# EAGLE board F405Pill (EAGLE 7.5.0)
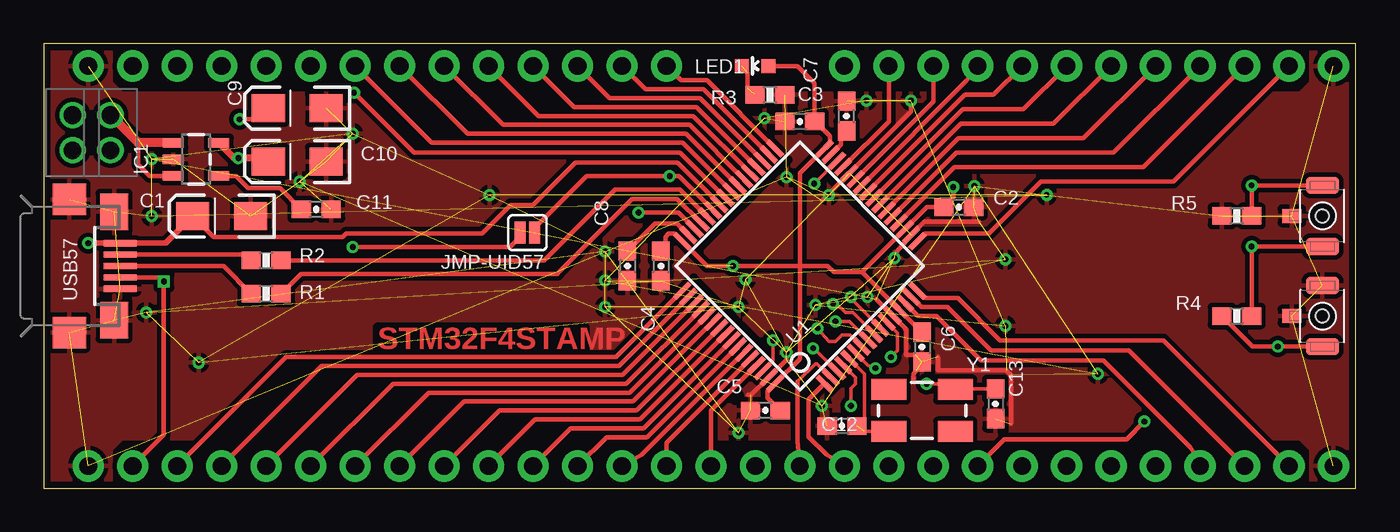
[diagram p0: board, top side]
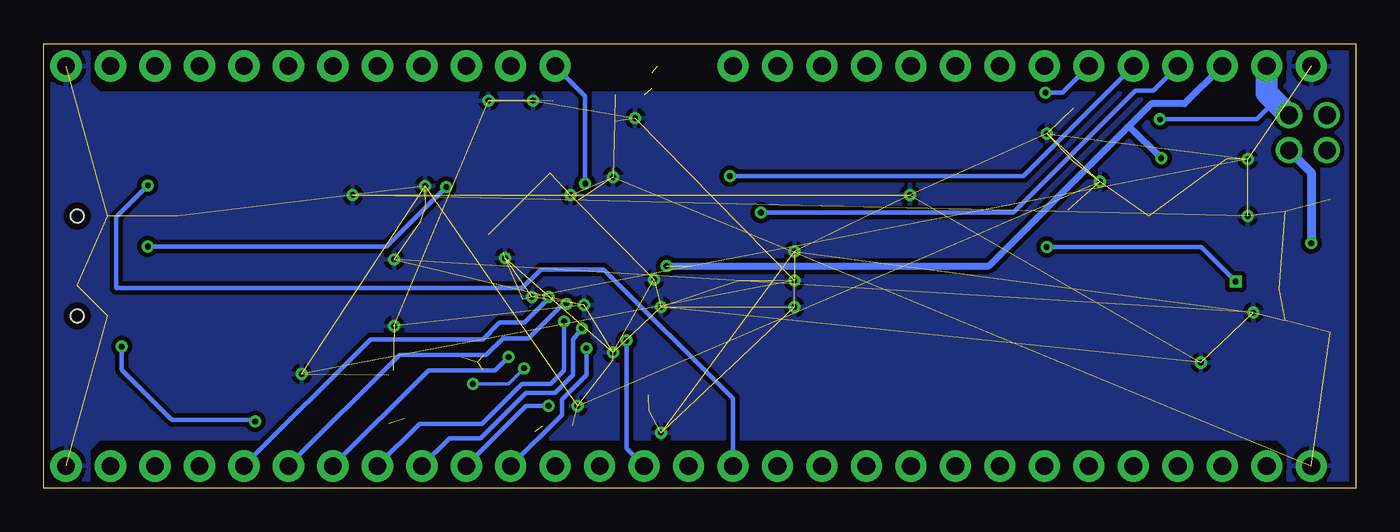
[diagram p1: board, bottom side, seen from below]

Size 74.93 x 25.4 mm. Coordinates in mm from the lower left corner, seen from the top.
Outline: 0,0 74.93,0 74.93,25.4 0,25.4 0,0
Copper layers (1*16): Top 0.0356mm / dielectric 1.5011mm / Bottom 0.0356mm
Design rules "default": minimum track width 6mil, minimum drill 13mil, track to track 6mil, track to pad 6mil, pad to pad 6mil, via to via 6mil, smd to smd 6mil, copper to edge 15mil, drill to drill 6mil, minimum pad ring 7mil, minimum via ring 7mil, stop-mask expansion 2mil, vias tented up to drill 25mil, thermal gap 10mil
tRestrict: 2 lines

## Footprints (pad centres in the part's own frame; a part is rotated, then mirrored left to right if it is on the bottom)
EIA3216-KIT = smd 1.9 x 1.6: A 1.65,0; C -1.65,0
0603-CAP = smd 1.1 x 1: 1 -0.85,0; 2 0.85,0
SOT23-5 = smd 0.55 x 1.2: 1 -0.95,-1.3; 2 0,-1.3; 3 0.95,-1.3; 4 0.95,1.3; 5 -0.95,1.3
1X02_2MM_TH = drill 1: 1 -1,0; 2 1,0
SJ_2S = smd 0.635 x 1.27: 1 -0.412,0; 2 0.412,0
1X1-HEADER-HOLE = drill 1.016 pad 1.778: 1 0,0
LED-0603 = smd 0.8 x 0.8: A 0,-0.75; C 0,0.75
0603-RES = smd 1.1 x 1: 1 -0.85,0; 2 0.85,0
SWITCH-TACT-B3U-1100P-B = smd 1 x 1.9: 1 -1.75,0; 2 1.75,0 | smd 0.8 x 1.1: BOSS 0,1.75 | hole 0.762: 0,0
LQFP64 = smd 0.3 x 1.2: 1 -3.75,-5.75; 2 -3.25,-5.75; 3 -2.75,-5.75; 4 -2.25,-5.75; 5 -1.75,-5.75; 6 -1.25,-5.75; 7 -0.75,-5.75; 8 -0.25,-5.75; 9 0.25,-5.75; 10 0.75,-5.75; 11 1.25,-5.75; 12 1.75,-5.75; 13 2.25,-5.75; 14 2.75,-5.75; 15 3.25,-5.75; 16 3.75,-5.75; 33 3.75,5.75; 34 3.25,5.75; 35 2.75,5.75; 36 2.25,5.75; 37 1.75,5.75; 38 1.25,5.75; 39 0.75,5.75; 40 0.25,5.75; 41 -0.25,5.75; 42 -0.75,5.75; 43 -1.25,5.75; 44 -1.75,5.75; 45 -2.25,5.75; 46 -2.75,5.75; 47 -3.25,5.75; 48 -3.75,5.75 | smd 1.2 x 0.3: 17 5.75,-3.75; 18 5.75,-3.25; 19 5.75,-2.75; 20 5.75,-2.25; 21 5.75,-1.75; 22 5.75,-1.25; 23 5.75,-0.75; 24 5.75,-0.25; 25 5.75,0.25; 26 5.75,0.75; 27 5.75,1.25; 28 5.75,1.75; 29 5.75,2.25; 30 5.75,2.75; 31 5.75,3.25; 32 5.75,3.75; 49 -5.75,3.75; 50 -5.75,3.25; 51 -5.75,2.75; 52 -5.75,2.25; 53 -5.75,1.75; 54 -5.75,1.25; 55 -5.75,0.75; 56 -5.75,0.25; 57 -5.75,-0.25; 58 -5.75,-0.75; 59 -5.75,-1.25; 60 -5.75,-1.75; 61 -5.75,-2.25; 62 -5.75,-2.75; 63 -5.75,-3.25; 64 -5.75,-3.75
USB-MICROB-SMD = smd 0.35 x 1.9: D+ 0,2.9; D- -0.65,2.9; GND 1.3,2.9; ID 0.65,2.9; VBUS -1.3,2.9 | smd 1.8 x 1.9: MT1 -3.8,0; MT2 3.8,0 | smd 2.1 x 1.6: MT3 -3.1,2.55; MT4 3.1,2.55
VPAC0 = drill 0.33 pad 0.686: VP 0,0
CRYSTAL-SMD-5X3 = smd 2 x 1.2: 1 -1.9,-1.2; 2 1.9,-1.2; 3 1.9,1.2; 4 -1.9,1.2

## Placement (x,y rotation side)
C1  4u7  [EIA3216-KIT]  10.16,15.56 180 top
C2  100n  [0603-CAP]  52.26,16.07 0 top
C3  100n  [0603-CAP]  43.18,20.95 180 top
C4  100n  [0603-CAP]  35.24,12.7 270 top
C5  100n  [0603-CAP]  41.21,4.45 180 top
C6  100n  [0603-CAP]  50.16,8.06 270 top
C7  2u2  [0603-CAP]  45.85,21.27 90 top
C8  2u2  [0603-CAP]  33.34,12.7 270 top
C9  4u7  [EIA3216-KIT]  14.48,21.72 180 top
C10  4u7  [EIA3216-KIT]  14.48,18.67 180 top
C11  470p  [0603-CAP]  15.56,15.94 180 top
C12  22p  [0603-CAP]  45.59,3.56 180 top
C13  22p  [0603-CAP]  54.36,4.83 270 top
IC1  VREG-3V3  [SOT23-5]  8.7,18.8 270 top
JMP-HOLDER57  [1X02_2MM_TH]  1.65,20.32 90 top
JMP-UID57  [SJ_2S]  27.62,14.61 180 top
JMP-USB57  [1X02_2MM_TH]  3.81,20.32 90 top
JP2  5V  [1X1-HEADER-HOLE]  5.08,24.13 0 top
JP3  GND  [1X1-HEADER-HOLE]  2.54,24.13 0 top
JP4  3V3  [1X1-HEADER-HOLE]  7.62,24.13 0 top
JP5  GND  [1X1-HEADER-HOLE]  2.54,1.27 0 top
JP6  GND  [1X1-HEADER-HOLE]  73.66,1.27 0 top
JP7  GND  [1X1-HEADER-HOLE]  73.66,24.13 0 top
JP8  PB8  [1X1-HEADER-HOLE]  38.1,1.27 0 top
JP9  PA10  [1X1-HEADER-HOLE]  12.7,24.13 0 top
JP10  PA8  [1X1-HEADER-HOLE]  15.24,24.13 0 top
JP11  PA13  [1X1-HEADER-HOLE]  10.16,24.13 0 top
JP12  PC9  [1X1-HEADER-HOLE]  17.78,24.13 0 top
JP13  PC15  [1X1-HEADER-HOLE]  50.8,1.27 0 top
JP14  PC14  [1X1-HEADER-HOLE]  48.26,1.27 0 top
JP15  PC13  [1X1-HEADER-HOLE]  43.18,1.27 0 top
JP16  PC12  [1X1-HEADER-HOLE]  17.78,1.27 0 top
JP17  PC11  [1X1-HEADER-HOLE]  15.24,1.27 0 top
JP18  PC10  [1X1-HEADER-HOLE]  12.7,1.27 0 top
JP19  PC8  [1X1-HEADER-HOLE]  20.32,24.13 0 top
JP20  PC7  [1X1-HEADER-HOLE]  22.86,24.13 0 top
JP21  PC6  [1X1-HEADER-HOLE]  25.4,24.13 0 top
JP22  PC5  [1X1-HEADER-HOLE]  55.88,24.13 0 top
JP23  PC4  [1X1-HEADER-HOLE]  58.42,24.13 0 top
JP24  PC3  [1X1-HEADER-HOLE]  58.42,1.27 0 top
JP25  PC2  [1X1-HEADER-HOLE]  63.5,1.27 0 top
JP26  PC1  [1X1-HEADER-HOLE]  60.96,1.27 0 top
JP27  PC0  [1X1-HEADER-HOLE]  55.88,1.27 0 top
JP28  PD2  [1X1-HEADER-HOLE]  20.32,1.27 0 top
JP29  PA0  [1X1-HEADER-HOLE]  66.04,1.27 0 top
JP30  PA1  [1X1-HEADER-HOLE]  68.58,1.27 0 top
JP31  PA2  [1X1-HEADER-HOLE]  71.12,1.27 0 top
JP32  PA3  [1X1-HEADER-HOLE]  71.12,24.13 0 top
JP33  PA4  [1X1-HEADER-HOLE]  68.58,24.13 0 top
JP34  PA5  [1X1-HEADER-HOLE]  66.04,24.13 0 top
JP35  PA6  [1X1-HEADER-HOLE]  63.5,24.13 0 top
JP36  PA7  [1X1-HEADER-HOLE]  60.96,24.13 0 top
JP37  PA14  [1X1-HEADER-HOLE]  7.62,1.27 0 top
JP38  PA15  [1X1-HEADER-HOLE]  10.16,1.27 0 top
JP39  PB0  [1X1-HEADER-HOLE]  53.34,24.13 0 top
JP40  PB1  [1X1-HEADER-HOLE]  50.8,24.13 0 top
JP41  PB3  [1X1-HEADER-HOLE]  22.86,1.27 0 top
JP42  PB4  [1X1-HEADER-HOLE]  25.4,1.27 0 top
JP43  PB5  [1X1-HEADER-HOLE]  27.94,1.27 0 top
JP44  PB6  [1X1-HEADER-HOLE]  30.48,1.27 0 top
JP45  PB7  [1X1-HEADER-HOLE]  33.02,1.27 0 top
JP46  PB9  [1X1-HEADER-HOLE]  40.64,1.27 270 top
JP47  PB10  [1X1-HEADER-HOLE]  48.26,24.13 270 top
JP48  PB11  [1X1-HEADER-HOLE]  45.72,24.13 270 top
JP49  PB12  [1X1-HEADER-HOLE]  35.56,24.13 270 top
JP50  PB13  [1X1-HEADER-HOLE]  33.02,24.13 270 top
JP51  PB14  [1X1-HEADER-HOLE]  30.48,24.13 270 top
JP52  PB15  [1X1-HEADER-HOLE]  27.94,24.13 270 top
JP53  VBAT  [1X1-HEADER-HOLE]  45.72,1.27 0 top
JP54  !RST  [1X1-HEADER-HOLE]  53.34,1.27 0 top
JP55  BOOT0  [1X1-HEADER-HOLE]  35.56,1.27 0 top
JP56  USB-ID  [1X1-HEADER-HOLE]  5.08,1.27 0 top
LED1  [LED-0603]  40.64,24.13 90 top
R1  22R  [0603-RES]  12.7,11.11 0 top
R2  22R  [0603-RES]  12.7,13.02 0 top
R3  470R  [0603-RES]  41.47,22.48 180 top
R4  10K  [0603-RES]  68.14,9.84 0 top
R5  10K  [0603-RES]  68.14,15.56 180 top
SW1  !RST  [SWITCH-TACT-B3U-1100P-B]  73.03,9.84 90 top
SW2  BOOT  [SWITCH-TACT-B3U-1100P-B]  73.03,15.56 90 top
U1  STM32F405RGT  [LQFP64]  43.18,12.7 45 top
USB57  USB-MICROB-SMD  [USB-MICROB-SMD]  1.46,12.7 270 top
VP_0  VPDEV0  [VPAC0]  42.42,17.78 0 top
VP_1  VPDEV0  [VPAC0]  44.83,16.76 0 top
VP_2  VPDEV0  [VPAC0]  40.07,11.94 0 top
VP_3  VPDEV0  [VPAC0]  42.42,7.75 0 top
VP_4  VPDEV0  [VPAC0]  48.58,13.14 0 top
VP_5  VPDEV0  [VPAC0]  47.05,10.92 0 top
VP_6  VPDEV0  [VPAC0]  6.16,18.8 0 top
VP_7  VPDEV0  [VPAC0]  17.65,20.26 0 top
VP_8  VPDEV0  [VPAC0]  14.61,17.53 0 top
VP_9  VPDEV0  [VPAC0]  44.45,4.7 0 top
VP_10  VPDEV0  [VPAC0]  53.15,17.27 0 top
VP_11  VPDEV0  [VPAC0]  60.2,6.54 0 top
VP_12  VPDEV0  [VPAC0]  32.07,11.87 0 top
VP_13  VPDEV0  [VPAC0]  41.15,21.15 0 top
VP_14  VPDEV0  [VPAC0]  46.99,22.16 0 top
VP_15  VPDEV0  [VPAC0]  49.53,22.16 0 top
VP_16  VPDEV0  [VPAC0]  54.93,9.27 0 top
VP_17  VPDEV0  [VPAC0]  44.07,10.48 0 top
VP_18  VPDEV0  [VPAC0]  54.93,13.08 0 top
VP_19  VPDEV0  [VPAC0]  5.84,10.03 0 top
VP_20  VPDEV0  [VPAC0]  32.07,13.53 0 top
VP_21  VPDEV0  [VPAC0]  39.69,3.17 0 top
VP_22  VPDEV0  [VPAC0]  32.07,10.35 0 top
VP_23  VPDEV0  [VPAC0]  39.69,10.35 0 top
VP_24  VPDEV0  [VPAC0]  8.84,7.18 0 top
VP_25  VPDEV0  [VPAC0]  25.46,16.76 0 top
VP_26  VPDEV0  [VPAC0]  57.28,16.76 0 top
VP_27  VPDEV0  [VPAC0]  6.16,15.56 0 top
Y1  8MHz  [CRYSTAL-SMD-5X3]  50.16,4.45 180 top

## Library data of the parts
C1-C13 IC1 JMP-HOLDER57 JMP-UID57 JMP-USB57 JP2-JP56 LED1 R1-R5 SW1 SW2 U1 USB57 Y1 = stm32f4stamp
VP_0 VP_1-VP_27 = vpad

## Nets
3.3V: C2.1 C3.1 C4.1 C5.1 C6.1 C10.A IC1.5 JP4.1 LED1.A R4.2 SW2.1 U1.13 U1.19 U1.32 U1.48 U1.64
5V: C9.A IC1.1 IC1.3 JMP-USB57.2 JP2.1
GND: C1.C C2.2 C3.2 C4.2 C5.2 C6.2 C7.2 C8.2 C9.C C10.C C11.1 C12.2 C13.2 IC1.2 JP3.1 JP5.1 JP6.1 JP7.1 R3.1 R5.2 SW1.2 SW1.BOSS SW2.BOSS U1.12 U1.18 U1.28 U1.63 USB57.GND USB57.MT1 USB57.MT2 USB57.MT3 USB57.MT4 VP_0.VP VP_1.VP VP_2.VP VP_3.VP VP_4.VP VP_5.VP VP_6.VP VP_7.VP VP_8.VP VP_9.VP VP_10.VP VP_11.VP VP_12.VP VP_13.VP VP_14.VP VP_15.VP VP_16.VP VP_17.VP VP_18.VP VP_19.VP VP_20.VP VP_21.VP VP_22.VP VP_23.VP VP_24.VP VP_25.VP VP_26.VP VP_27.VP
N$1: R1.2 U1.45
N$2: R2.2 U1.44
N$3: C1.A JMP-USB57.1 U1.42 USB57.VBUS
N$4: JP12.1 U1.40
N$5: R1.1 USB57.D+
N$6: R2.1 USB57.D-
N$7: JP8.1 U1.61
N$8: C11.2 IC1.4
N$10: JP10.1 U1.41
N$11: JP11.1 U1.46
N$12: C13.1 U1.6 Y1.1
N$13: C7.1 U1.31
N$14: C8.1 U1.47
N$15: C12.1 U1.5 Y1.3
N$16: JP55.1 R5.1 SW2.2 U1.60
N$17: JP54.1 R4.1 SW1.1 U1.7
N$18: LED1.C R3.2
N$20: JMP-UID57.2 JP56.1 USB57.ID
N$22: JMP-UID57.1 JP9.1 U1.43
N$23: JP13.1 U1.4
N$24: JP14.1 U1.3
N$25: JP15.1 U1.2
N$26: JP16.1 U1.53
N$27: JP17.1 U1.52
N$28: JP18.1 U1.51
N$29: JP19.1 U1.39
N$30: JP20.1 U1.38
N$31: JP21.1 U1.37
N$32: JP22.1 U1.25
N$33: JP23.1 U1.24
N$34: JP24.1 U1.11
N$35: JP25.1 U1.10
N$36: JP26.1 U1.9
N$37: JP27.1 U1.8
N$38: JP28.1 U1.54
N$39: JP29.1 U1.14
N$40: JP30.1 U1.15
N$41: JP31.1 U1.16
N$42: JP32.1 U1.17
N$43: JP33.1 U1.20
N$44: JP34.1 U1.21
N$45: JP35.1 U1.22
N$46: JP36.1 U1.23
N$47: JP37.1 U1.49
N$48: JP38.1 U1.50
N$49: JP39.1 U1.26
N$50: JP40.1 U1.27
N$51: JP41.1 U1.55
N$52: JP42.1 U1.56
N$53: JP43.1 U1.57
N$54: JP44.1 U1.58
N$55: JP45.1 U1.59
N$56: JP46.1 U1.62
N$57: JP47.1 U1.29
N$58: JP48.1 U1.30
N$59: JP49.1 U1.33
N$60: JP50.1 U1.34
N$61: JP51.1 U1.35
N$62: JP52.1 U1.36
N$63: JP53.1 U1.1

## Tracks (layer width: path | path; a pad name or v marks a point on that pad's centre or on a via)
3.3V  (via drill 0.33)  (1 unrouted)
  Top 0.254: C6.1 50.16,8.9 U1.13 46.72,12.35 | 43.18,12.7 37.88,12.7 U1.48 36.03,14.54 35.68,14.54 35.5,14.36 35.5,14.03 35.24,13.78 C4.1 | 43.18,12.7 43.18,18 U1.32 44.9,19.72 44.9,20.13 44.07,20.95 C3.1 44.03,23.15 43.05,24.13 LED1.A | 46.72,12.35 U1.19 50.44,16.07 C2.1 51.94,16.6 v51.94,17.21 | 43.18,12.7 43.18,7.4 U1.64 41.34,5.55 41.34,5.17 C5.1 | 46.72,12.35 45.12,12.35 44.77,12.7 43.18,12.7 | SW2.1 v68.99,13.81 R4.2
  Top 0.406: IC1.5 10.89,18.86 v11.11,18.86 12.64,18.86 C10.A
  Bottom 0.254: v51.94,17.21 55.34,13.81 v68.99,13.81
  Bottom 0.406: v39.37,12.7 20.95,12.7 13.02,20.64 | 13.02,20.64 11.68,21.97 9.78,21.97 JP4.1 | v11.11,18.86 12.89,20.64 13.02,20.64
5V  (via drill 0.33)
  Top 0.254: v11.18,21.08 13.02,21.08 C9.A | IC1.3 6.04,17.85 5.4,18.49 5.4,19.75
  Top 0.508: IC1.1 5.4,19.75 5.38,19.75 JMP-USB57.2
  Bottom 0.254: v11.18,21.08 5.65,21.08 4.61,22.12
  Bottom 1.27: JMP-USB57.2 4.61,22.12 5.08,22.59 JP2.1
GND  (116 unrouted)
  Top 0.203: 44.45,16.45 VP_1.VP
  Top 0.254: 42.42,7.34 U1.63 40.4,5.32 40.22,5.32 | 47.56,10.79 U1.12 49.24,9.11 49.24,7.65 49.28,7.62 49.78,7.62 | 48.66,13.46 U1.18 50.31,15.23 53.42,15.23 | 55.24,3.68 55.24,6.48 54.99,6.73 51.05,6.73 51.05,7.49 | 44.45,16.45 49.53,21.52 VP_15.VP | 49.85,6.73 49.66,6.54 49.66,6.16
  pour Bottom (isolate 0.254): 0,25.4 3.81,25.4 3.81,23.18 4.45,22.54 71.75,22.54 72.39,23.18 72.39,25.4 74.93,25.4 74.93,0 72.39,0 72.39,2.22 71.75,2.86 4.45,2.86 3.81,2.22 3.81,0 0,0
  pour Top (isolate 0.254): 0,25.4 3.81,25.4 3.81,23.18 4.45,22.54 71.75,22.54 72.39,23.18 72.39,25.4 74.93,25.4 74.93,0 72.39,0 72.39,2.22 71.75,2.86 4.45,2.86 3.81,2.22 3.81,0 0,0
N$1
  Top 0.254: U1.45 36.17,16.53 33.61,16.53 29.46,12.38 29.34,12.26 14.69,12.26 R1.2
N$2
  Top 0.254: U1.44 36.34,17.07 32.63,17.07 28.89,13.34 28.57,13.02 R2.2
N$3  (via drill 0.33)
  Top 0.254: U1.42 36.2,18.62 30.36,18.62 27.94,16.19 26.67,16.19 25.02,14.54 17.27,14.54 17.08,14.35 9.72,14.35 C1.A
  Top 0.305: C1.A 6.95,14 USB57.VBUS v2.54,14
  Bottom 0.508: JMP-USB57.1 2.54,18.05 v2.54,14
N$4
  Top 0.254: U1.40 36.48,19.75 22.16,19.75 JP12.1
N$5
  Top 0.254: USB57.D+ 10.26,12.7 R1.1
N$6
  Top 0.254: USB57.D- 11.84,13.35 R2.1
N$7
  Top 0.254: U1.61 38.1,4.44 JP8.1
N$8
  Top 0.254: IC1.4 10.98,17.85 11.68,17.14 13.5,17.14 C11.2
N$10  (via drill 0.33)
  Top 0.254: U1.41 36.35,19.18 21.14,19.18 v17.72,22.61
  Bottom 0.254: v17.72,22.61 16.76,22.61 JP10.1
N$11  (via drill 0.33)
  Top 0.254: U1.46 36.24,15.75 v33.97,15.75
  Bottom 0.254: JP11.1 11.56,22.73 12.57,22.73 19.56,15.75 v33.97,15.75
N$12  (via drill 0.33)
  Top 0.203: U1.6 47.08,7.03 v47.5,6.86 | v50.42,5.97 52.06,5.97 Y1.1 52.06,5.68 C13.1
  Bottom 0.203: v47.5,6.86 48.39,5.97 v50.42,5.97
N$13
  Top 0.254: U1.31 45.53,19.65 45.53,20 45.85,20.32 C7.1
N$14
  Top 0.254: U1.47 36.17,15.11 34.9,15.11 C8.1
N$15  (1 unrouted)
  Top 0.203: U1.5 46.86,6.54 46.86,3.25 Y1.3 47.72,3.25
N$16  (via drill 0.33)
  Top 0.254: U1.60 35.56,2.6 JP55.1 | SW2.2 v68.99,17.31 R5.1
  Bottom 0.254: JP55.1 35.56,5.13 42.95,12.51 46.54,12.51 47.62,11.43 70.8,11.43 70.8,15.49 v68.99,17.31
N$17  (via drill 0.33)
  Top 0.203: U1.7 46.06,8.76 45.59,8.76 45.21,8.38 44.83,8.38 v44.2,9.14
  Top 0.254: JP54.1 54.86,2.79 61.85,2.79 v62.87,3.81 | R4.1 69.03,8.09 v70.48,8.09 SW1.1
  Bottom 0.254: JP54.1 51.75,2.86 49.97,2.86 47.37,5.46 45.72,5.46 44.7,6.48 44.7,8.51 v44.2,9.14 | v62.87,3.81 62.99,3.91 67.63,3.91 70.48,6.77 v70.48,8.09
N$18  (2 unrouted)
  Top 0.254: 40.2,23.75 40.2,22.86
N$20  (via drill 0.33)
  Top 0.254: USB57.ID 6.62,12.05 v6.86,11.81 6.86,3.05 JP56.1 | v17.65,13.78 26.64,13.78 27.21,14.35 JMP-UID57.2
  Bottom 0.254: v17.65,13.78 8.83,13.78 v6.86,11.81
N$22  (via drill 0.33)
  Top 0.254: U1.43 36.27,17.84 v35.75,17.84 31,17.84 28.03,14.87 JMP-UID57.1
  Bottom 0.254: v35.75,17.84 18.99,17.84 JP9.1
N$23  (via drill 0.33)
  Top 0.203: U1.4 46.35,6.34 46.35,5.97 46.1,5.71 v46.1,4.7
  Bottom 0.254: JP13.1 47.37,4.7 v46.1,4.7
N$24  (via drill 0.33)
  Top 0.203: U1.3 43.99,8
  Top 0.254: 43.99,8 v43.94,8
  Bottom 0.254: JP14.1 45.34,4.19 45.34,5.08 43.94,6.48 v43.94,8
N$25
  Top 0.203: U1.2 44.17,7.11 44.07,7.11 43.05,6.1
  Top 0.254: 43.05,6.1 43.05,2.67 JP15.1
N$26
  Top 0.254: U1.53 33.47,5.46 21.97,5.46 JP16.1
N$27
  Top 0.254: U1.52 33.27,5.97 19.94,5.97 JP17.1
N$28
  Top 0.254: U1.51 33.07,6.48 17.91,6.48 JP18.1
N$29
  Top 0.254: U1.39 36.68,20.26 24.19,20.26 JP19.1
N$30
  Top 0.254: U1.38 36.88,20.77 26.23,20.77 JP20.1
N$31
  Top 0.254: U1.37 37.08,21.27 28.26,21.27 JP21.1
N$32
  Top 0.254: U1.25 52.6,22.48 54.23,22.48 JP22.1
N$33
  Top 0.254: U1.24 52.49,21.65 55.94,21.65 JP23.1
N$34  (via drill 0.33)
  Top 0.203: U1.11 48.77,8.88 48.77,7.87 v48.39,7.49
  Bottom 0.254: JP24.1 52.96,6.73 49.15,6.73 v48.39,7.49
N$35  (via drill 0.33)
  Top 0.203: U1.10 46.1,10.84
  Top 0.254: 46.1,10.84 v46.1,10.92
  Bottom 0.254: JP25.1 56.26,8.51 49.85,8.51 48.9,9.46 47.48,9.46 46.1,10.84 v46.1,10.92
N$36  (via drill 0.33)
  Top 0.203: U1.9 46.2,10.03 45.78,10.03 45.28,10.54
  Top 0.254: 45.28,10.54 v45.09,10.54
  Bottom 0.254: JP26.1 54.61,7.62 49.66,7.62 48.7,8.57 47.24,8.57 45.28,10.54 v45.09,10.54
N$37  (via drill 0.33)
  Top 0.203: U1.8 46,9.53 v45.21,9.53
  Bottom 0.254: JP27.1 53.47,3.68 49.91,3.68 47.62,5.97 45.97,5.97 45.21,6.73 v45.21,9.53
N$38
  Top 0.254: U1.54 33.66,4.95 24,4.95 JP28.1
N$39
  Top 0.254: U1.14 49.93,9.84 50.99,9.84 53.53,7.3 60.51,7.3 65.48,2.33 65.8,1.84 JP29.1
N$40
  Top 0.254: U1.15 50.13,10.35 51.61,10.35 54.09,7.87 61.98,7.87 JP30.1
N$41
  Top 0.254: U1.16 50.33,10.86 52.2,10.86 54.61,8.45 63.94,8.45 JP31.1
N$42
  Top 0.254: U1.17 50.33,14.54 53.98,14.54 56.96,17.53 64.52,17.53 JP32.1
N$43
  Top 0.254: U1.20 52.01,18.35 62.8,18.35 JP33.1
N$44
  Top 0.254: U1.21 52.13,19.18 61.09,19.18 JP34.1
N$45
  Top 0.254: U1.22 52.25,20 59.37,20 JP35.1
N$46
  Top 0.254: U1.23 52.37,20.83 57.66,20.83 JP36.1
N$47
  Top 0.254: U1.49 32.67,7.49 13.84,7.49 JP37.1
N$48
  Top 0.254: U1.50 32.87,6.99 15.88,6.99 JP38.1
N$49
  Top 0.254: U1.26 52.7,23.29 JP39.1
N$50
  Top 0.254: U1.27 50.8,22.09 JP40.1
N$51
  Top 0.254: U1.55 33.86,4.45 26.04,4.45 JP41.1
N$52
  Top 0.254: U1.56 34.06,3.94 28.07,3.94 JP42.1
N$53
  Top 0.254: U1.57 34.26,3.43 30.1,3.43 JP43.1
N$54
  Top 0.254: U1.58 34.46,2.92 32.13,2.92 JP44.1
N$55
  Top 0.254: U1.59 34.15,1.91 JP45.1
N$56  (via drill 0.33)
  Top 0.203: U1.62 41.66,7.29 v41.66,8.45
  Bottom 0.254: JP46.1 41.66,2.29 v41.66,8.45
N$57
  Top 0.254: U1.29 48.26,20.96 JP47.1
N$58  (via drill 0.33)
  Top 0.203: U1.30 v44.01,17.41
  Bottom 0.254: v44.01,17.41 44.01,22.42 JP48.1
N$59
  Top 0.254: U1.33 37.88,23.3 36.39,23.3 JP49.1
N$60
  Top 0.254: U1.34 37.68,22.8 34.35,22.8 JP50.1
N$61
  Top 0.254: U1.35 37.48,22.29 32.32,22.29 JP51.1
N$62
  Top 0.254: U1.36 37.28,21.78 30.29,21.78 JP52.1
N$63
  Top 0.254: U1.1 43.69,5.08 43.69,2.94 44.73,1.91 JP53.1

## Text on the board
Top: STM32F4STAMP
tStop: STM32F4STAMP
_tsilk: BOOT | Frank Zhao | RST | SWCLK | 20131027
_bsilk: SWDIO | SWCLK
UNCONECTED_WireText: TE:N$18:16:17::L19 | TS:N$18:15:17::L1 | TS:N$18:16:17::L19 | TE:N$18:15:17::L1 | TE:N$18:17:17::L19 | FillOverPAD:GND:99:187 | FillOverPAD:GND:18:187 | TS:N$18:17:17::L19 | FillOverPAD:GND:14:187 | V:GND:15:28 | TE:GND:7:17::L1 | TE:GND:8:17::L1 | TS:GND:8:17::L1 | V:GND:16:28 | V:GND:14:28 | FillOverPAD:GND:6:187 | V:GND:8:28 | V:GND:7:28 | FillOverPAD:GND:28:187 | FillOverPAD:GND:20:187 | V:GND:9:28 | V:GND:1:28 | TE:GND:11:17::L19 | FillOverPAD:GND:138:187 | FillOverPAD:GND:179:187 | V:GND:26:28 | TE:GND:2:17::L1 | TS:GND:11:17::L19 | V:GND:2:28 | V:GND:11:28 | V:GND:27:28 | FillOverPAD:GND:181:187 | V:GND:28:28 | FillOverPAD:GND:2:187 | FillOverPAD:GND:21:187 | TS:GND:2:17::L1 | TS:GND:7:17::L1 | FillOverPAD:GND:4:187 | FillOverPAD:GND:104:187 | FillOverPAD:GND:110:187 | FillOverPAD:GND:128:187 | V:GND:21:28 | TE:3.3V:1:17::L19 | TS:3.3V:1:17::L19 | TE:GND:12:17::L19 | TS:GND:12:17::L19 | V:GND:5:28 | V:GND:19:28 | V:GND:13:28 | FillOverPAD:GND:16:187 | FillOverPAD:GND:8:187 | V:GND:3:28 | FillOverPAD:GND:106:187 | FillOverPAD:GND:177:187 | V:GND:18:28 | TE:GND:13:17::L19 | V:GND:6:28 | TS:GND:13:17::L19 | FillOverPAD:GND:182:187 | V:GND:20:28 | V:GND:23:28 | V:GND:24:28 | FillOverPAD:GND:122:187 | FillOverPAD:GND:107:187 | FillOverPAD:GND:180:187 | V:GND:17:28 | V:GND:4:28 | V:GND:25:28 | TE:GND:9:17::L1 | TS:GND:10:17::L1 | TS:GND:9:17::L1 | FillOverPAD:GND:12:187 | TE:GND:5:17::L1 | TE:GND:6:17::L1 | TS:GND:6:17::L1 | TE:GND:4:17::L1 | TS:GND:5:17::L1 | V:GND:12:28 | FillOverPAD:GND:173:187 | TE:GND:10:17::L1 | TE:GND:3:17::L1 | TS:GND:4:17::L1 | V:GND:10:28 | FillOverPAD:GND:10:187 | FillOverPAD:GND:24:187 | TE:N$15:14:17::L19 | FillOverPAD:GND:26:187 | TS:GND:3:17::L1 | V:GND:22:28 | TS:N$15:14:17::L19